# EAGLE board gamebuino-hack (EAGLE 9.5.2)
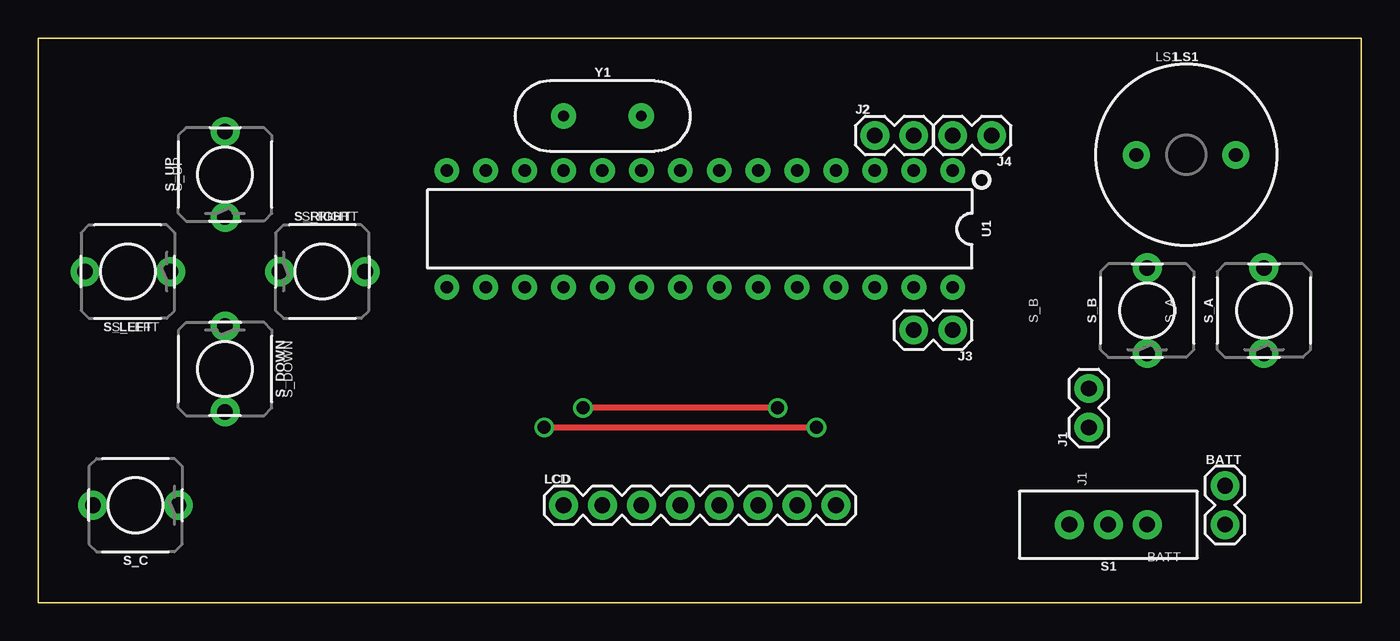
[diagram p0: board, top side]
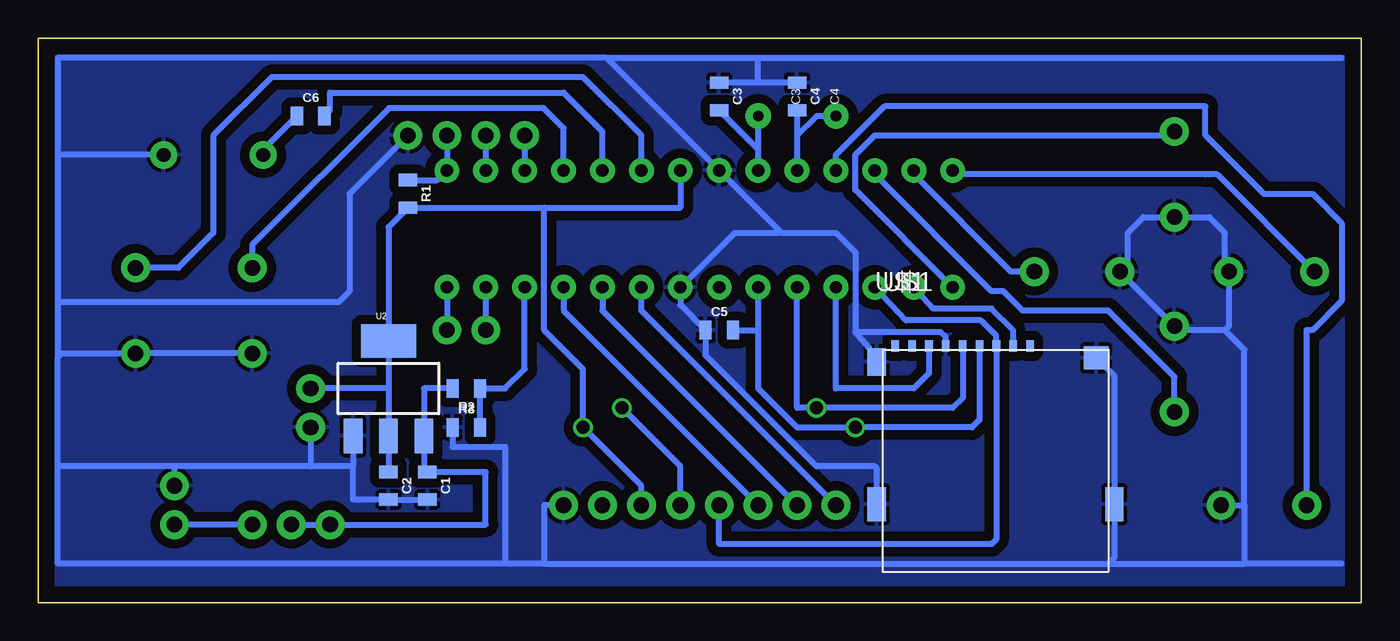
[diagram p1: board, bottom side, seen from below]

Size 86.36 x 36.82 mm. Coordinates in mm from the lower left corner, seen from the top.
Outline: 0,0 86.36,0 86.36,36.82 0,36.82 0,0
Copper layers (1*16): Top 0.035mm / dielectric 1.5mm / Bottom 0.035mm
Design rules "default": minimum track width 6mil, minimum drill 0.35mm, track to track 6mil, track to pad 6mil, pad to pad 6mil, via to via 6mil, smd to smd 6mil, copper to edge 40mil, drill to drill 6mil, minimum pad ring 10mil, minimum via ring 8mil, stop-mask expansion 4mil, vias tented up to drill 0mil, thermal gap 10mil

## Footprints (pad centres in the part's own frame; a part is rotated, then mirrored left to right if it is on the bottom)
1X02 = drill 1.016 pad 1.88: 1 0,0; 2 2.54,0
0805 = smd 0.8 x 1.2: 1 -0.9,0; 2 0.9,0
1X08 = drill 1.016 pad 1.88: 1 0,0; 2 2.54,0; 3 5.08,0; 4 7.62,0; 5 10.16,0; 6 12.7,0; 7 15.24,0; 8 17.78,0
BUZZER-12MM = drill 0.9 pad 1.778: + 3.25,0; - -3.25,0
SWITCH_SPDT_PTH_11.6X4.0MM = drill 1.016 pad 1.88: 1 0,2.54; 2 0,0; 3 0,-2.54
BUTTON_SW2 = drill 1.016 pad 1.88: 1 -2.794,0; 2 2.794,0
DIP28 = drill 0.813 pad 1.626: 1 -16.51,-3.81; 2 -13.97,-3.81; 3 -11.43,-3.81; 4 -8.89,-3.81; 5 -6.35,-3.81; 6 -3.81,-3.81; 7 -1.27,-3.81; 8 1.27,-3.81; 9 3.81,-3.81; 10 6.35,-3.81; 11 8.89,-3.81; 12 11.43,-3.81; 13 13.97,-3.81; 14 16.51,-3.81; 15 16.51,3.81; 16 13.97,3.81; 17 11.43,3.81; 18 8.89,3.81; 19 6.35,3.81; 20 3.81,3.81; 21 1.27,3.81; 22 -1.27,3.81; 23 -3.81,3.81; 24 -6.35,3.81; 25 -8.89,3.81; 26 -11.43,3.81; 27 -13.97,3.81; 28 -16.51,3.81
SOT223 = smd 1.219 x 2.235: 1 -2.311,-3.099; 2 0,-3.099; 3 2.311,-3.099 | smd 3.6 x 2.2: 4 0,3.099
MICROSD-PUSH-OUT = smd 0.5 x 0.75: 1 9.625,0.225; 2 8.525,0.225; 3 7.425,0.225; 4 6.325,0.225; 5 5.225,0.225; 6 4.125,0.225; 7 3.025,0.225; 8 1.925,0.225; CD 0.825,0.225 | smd 1.2 x 1.8: G1 -0.375,-0.8 | smd 1.2 x 2.2: G2 -0.375,-10.1; G4 15.125,-10.1 | smd 1.6 x 1.5: G3 13.95,-0.55
HC49US = drill 0.7 pad 1.651: 1 -2.54,0; 2 2.54,0

## Placement (x,y rotation side)
BATT  [1X02]  77.47,7.62 270 top
C1  10mF  [0805]  60.96,7.62 270 bottom
C2  10mF  [0805]  63.5,7.62 270 bottom
C3  22pF  [0805]  41.91,33.02 270 bottom
C4  22pF  [0805]  36.83,33.02 270 bottom
C5  100nF  [0805]  41.91,17.78 0 bottom
C6  10mF  [0805]  68.58,31.75 0 bottom
J1  [1X02]  68.58,11.43 90 top
J2  [1X02]  54.61,30.48 0 top
J3  [1X02]  59.69,17.78 180 top
J4  [1X02]  62.23,30.48 180 top
LCD  [1X08]  34.29,6.35 0 top
LS1  BUZZER-PTH  [BUZZER-12MM]  74.93,29.21 0 top
R1  10K  [0805]  62.23,26.67 270 bottom
R2  10K  [0805]  58.42,13.97 180 bottom
R3  10K  [0805]  58.42,11.43 0 bottom
S1  [SWITCH_SPDT_PTH_11.6X4.0MM]  69.85,5.08 90 top
S_A  BUTTON_SW2  [BUTTON_SW2]  80.01,19.05 90 top
S_B  BUTTON_SW2  [BUTTON_SW2]  72.39,19.05 90 top
S_C  BUTTON_SW2  [BUTTON_SW2]  6.35,6.35 180 top
S_DOWN  BUTTON_SW2  [BUTTON_SW2]  12.19,15.24 270 top
S_LEFT  BUTTON_SW2  [BUTTON_SW2]  5.84,21.59 180 top
S_RIGHT  BUTTON_SW2  [BUTTON_SW2]  18.54,21.59 0 top
S_UP  BUTTON_SW2  [BUTTON_SW2]  12.19,27.94 90 top
U1  328P  [DIP28]  43.18,24.38 180 top
U2  [SOT223]  63.5,13.97 0 bottom
U$1  MICROSD-PUSH-OUT  [MICROSD-PUSH-OUT]  31.24,16.51 0 bottom
Y1  16MHz  [HC49US]  36.83,31.75 0 top

## Library data of the parts
BATT J1-J4 = SparkFun-Connectors
C1-C6 R1-R3 S_A S_B S_C S_DOWN S_LEFT S_RIGHT S_UP = myParts
LCD = SparkFun-Connectors; PROD_ID: CONN-08438
LS1 = SparkFun-Electromechanical; PROD_ID: COMP-08253; SF_SKU: COM-07950
S1 = SparkFun-Switches; PROD_ID: SWCH-08261; SF_SKU: COM-00102
U1 = SparkFun-IC-Microcontroller; PROD_ID: IC-09136
U2 = SparkFun-IC-Power; PROD_ID: VREG-08170
U$1 = microsd
Y1 = SparkFun-Clocks; PROD_ID: XTAL-08181; SF_ID: COM-00536

## Nets
3.3V: C2.1 C5.2 J1.2 LCD.6 R1.2 U1.7 U1.20 U2.2 U2.4 U$1.4
BTN_A: S_A.2 U1.6
BTN_B: S_B.2 U1.4
BTN_C: S_C.2 U1.11
BTN_DOWN: S_DOWN.2 U1.12
BTN_LEFT: S_LEFT.2 U1.14
BTN_RIGHT: S_RIGHT.2 U1.13
BTN_UP: S_UP.2 U1.15
GND: BATT.1 C1.2 C2.2 C3.1 C4.1 C5.1 J1.1 J4.1 LCD.8 LS1.+ R3.1 S_A.1 S_B.1 S_C.1 S_DOWN.1 S_LEFT.1 S_RIGHT.1 S_UP.1 U1.8 U1.22 U2.1 U$1.6 U$1.G1 U$1.G2 U$1.G3 U$1.G4
LCD_CE: LCD.2 U1.24
LCD_DC: LCD.3 U1.25
LCD_LED: LCD.7
LCD_RST: LCD.1 U1.23
MISO: U1.18 U$1.7
MOSI: LCD.4 U1.17 U$1.3
N$2: C6.1 LS1.-
N$9: C3.2 U1.9 Y1.2
N$10: C4.2 U1.10 Y1.1
RST: J4.2 R1.1 U1.1
RX: J2.2 U1.2
SCK: LCD.5 U1.19 U$1.5
SCL: J3.1 U1.28
SD_SS: U1.16 U$1.2
SDA: J3.2 U1.27
SOUND: C6.2 U1.5
TX: J2.1 U1.3
V_BATT: BATT.2 S1.3
VBATT: R2.1 R3.2 U1.26
VIN: C1.1 R2.2 S1.1 S1.2 U2.3

## Tracks (layer width: path | path; a pad name or v marks a point on that pad's centre or on a via)
3.3V  (via drill 0.85)
  Top 0.406: v33.02,11.43 v50.8,11.43
  Bottom 0.406: U1.20 39.37,17.78 | 39.37,17.78 39.37,13.97 36.83,11.43 v33.02,11.43 25.4,11.43 24.92,11.91 U$1.4 | C5.2 39.37,17.78 | 44.45,27.94 U1.7 44.45,25.77 53.34,25.77 | 53.34,25.77 R1.2 63.5,24.5 U2.4 63.5,13.97 | LCD.6 46.99,7.62 v50.8,11.43 50.8,15.24 53.34,17.78 53.34,25.77 | 63.5,13.97 U2.2 C2.1 | 63.5,13.97 J1.2
BTN_A
  Bottom 0.406: U1.6 46.99,30.48 50.8,34.29 71.12,34.29 74.93,30.48 74.93,24.13 77.22,21.84 S_A.2
BTN_B
  Bottom 0.406: U1.4 52.07,30.96 53.37,32.26 63.48,32.26 72.39,23.34 S_B.2
BTN_C
  Bottom 0.406: S_C.2 3.56,17.78 3.17,17.78 1.27,19.68 1.27,24.77 3.17,26.67 6.35,26.67 10.16,30.48 10.16,32.38 31.11,32.38 34.29,29.21 U1.11
BTN_DOWN
  Bottom 0.406: U1.12 31.75,27.94 24.13,20.32 23.37,20.32 22.1,19.05 16.51,19.05 12.19,14.73 S_DOWN.2
BTN_LEFT
  Bottom 0.406: U1.14 26.42,27.94 10.16,27.94 9.91,27.94 9.4,27.94 S_LEFT.2
BTN_RIGHT
  Bottom 0.406: S_RIGHT.2 22.86,21.59 29.21,27.94 U1.13
BTN_UP
  Bottom 0.406: S_UP.2 12.95,30.48 31.75,30.48 33.02,29.21 33.02,26.92 U1.15
GND
  Bottom 0.406: U$1.G1 32.12,16.63 33.02,17.65 | 33.02,17.65 33.02,22.86 34.29,24.13 37.85,24.13 37.97,24.26 | 7.62,6.35 7.62,16.51 8.89,17.78 | S_C.1 7.62,6.35 | U$1.G4 16.51,6.29 | 1.27,2.54 7.62,2.54 | 7.62,6.35 7.62,2.54 | 85.09,29.21 85.09,19.61 | LS1.+ 85.09,29.21 | 53.34,2.54 53.34,6.35 LCD.8 | 53.34,2.54 16.51,2.54 | 16.51,2.54 7.62,2.54 | 37.97,24.26 U1.8 49.27,35.55 | J4.1 66.04,26.67 66.04,20.32 66.75,19.61 85.09,19.61 | S_B.1 S_A.1 84.84,16.26 85.09,16 | U2.1 65.81,8.89 | 53.34,2.54 55.88,2.54 | 55.88,2.54 85.09,2.54 85.09,8.89 | 85.09,8.89 85.09,16 | 37.97,24.26 38.1,24.13 40.89,24.13 U1.22 44.45,19.42 C5.1 42.81,16.14 35.56,8.89 31.75,8.89 31.62,8.76 U$1.G2 | C1.2 C2.2 65.81,6.72 65.81,8.89 | 65.81,8.89 68.58,8.89 | 68.58,8.89 77.47,8.89 | 77.47,8.89 85.09,8.89 | BATT.1 77.47,8.89 | J1.1 68.58,8.89 | R3.1 59.32,10.16 55.88,10.16 55.88,2.54 | 49.27,35.55 85.09,35.55 85.09,29.21 | C4.1 39.37,33.92 | 39.37,33.92 C3.1 | 49.27,35.55 39.37,35.55 | 39.37,35.55 1.27,35.55 | 39.37,33.92 39.37,35.55 | 85.09,19.61 85.09,16 | 8.89,17.78 11.94,17.78 S_DOWN.1 S_RIGHT.1 15.24,22.1 15.24,24.13 14.22,25.15 S_UP.1 9.91,25.15 8.89,24.13 8.89,21.84 S_LEFT.1 8.64,18.03 8.89,17.78 | U$1.6 27.12,17.33 27.44,17.65 33.02,17.65 | U$1.G3 16.12,14.79 U$1.G4 | U$1.G4 16.12,2.93 16.51,2.54
  pour Bottom (isolate 0.61): 0,36.83 86.36,36.83 86.36,0 0,0
LCD_CE
  Bottom 0.406: U1.24 49.53,19.05 LCD.2
LCD_DC
  Bottom 0.406: LCD.3 52.07,19.05 U1.25
LCD_RST
  Bottom 0.406: LCD.1 46.99,19.05 U1.23
MISO
  Bottom 0.406: U1.18 34.29,13.97 29.21,13.97 28.22,14.96 U$1.7
MOSI
  Bottom 0.406: U1.17 29.72,18.41 24.83,18.41 23.82,17.4 U$1.3 23.82,4.12 24.13,3.81 41.91,3.81 LCD.4
N$2
  Bottom 0.406: C6.1 71.68,29.55 LS1.-
N$9
  Bottom 0.406: Y1.2 39.37,29.58 | U1.9 39.37,29.21 39.37,29.58 | C3.2 39.37,29.58
N$10
  Bottom 0.406: 36.83,30.48 U1.10 | Y1.1 35.56,31.75 36.83,30.48 | C4.2 36.83,30.48
RST
  Bottom 0.406: J4.2 U1.1 60.31,27.57 R1.1
RX
  Bottom 0.406: J2.2 U1.2
SCK  (via drill 0.85)
  Top 0.406: v48.26,12.7 v35.56,12.7
  Bottom 0.406: U1.19 36.83,12.7 v35.56,12.7 26.67,12.7 26.02,13.35 U$1.5 | LCD.5 44.45,8.89 v48.26,12.7
SCL
  Bottom 0.406: U1.28 J3.1
SD_SS
  Bottom 0.406: U1.16 27.94,19.18 24.13,19.18 22.72,17.76 U$1.2
SDA
  Bottom 0.406: U1.27 J3.2
SOUND
  Bottom 0.406: U1.5 49.53,30.73 52.07,33.27 67.31,33.27 67.31,32.12 C6.2
TX
  Bottom 0.406: J2.1 U1.3
V_BATT
  Bottom 0.406: S1.3 BATT.2
VBATT
  Bottom 0.406: R3.2 R2.1 55.88,13.97 54.61,15.24 U1.26
VIN
  Bottom 0.406: S1.2 S1.1 57.15,5.08 57.15,8.52 C1.1 61.19,8.52 U2.3 61.19,13.97 R2.2

## Text on the board
_tNames: LS1 | Y1 | J2 | J4 | S_UP | S_RIGHT | U1 | S_B | S_A | S_LEFT | J3 | S_DOWN | LCD | J1 | S_C | BATT
_bNames: C4 | C3 | R1 | U$1 | C5 | U2 | R2 | R3 | C1 | C2